# Altium PCB PCB1.pcbdoc (part 1 of 2)
Units mil, origin at the board's own origin, x right, y up, seen from the top; angles counter-clockwise.
Board outline 826.77 x 2007.87 mil, 4 copper layers (Top Layer, Inner1, Inner2, Bottom Layer), stack 62.447 mil thick; 60 components, 78 nets, 305 pads, 176 vias.
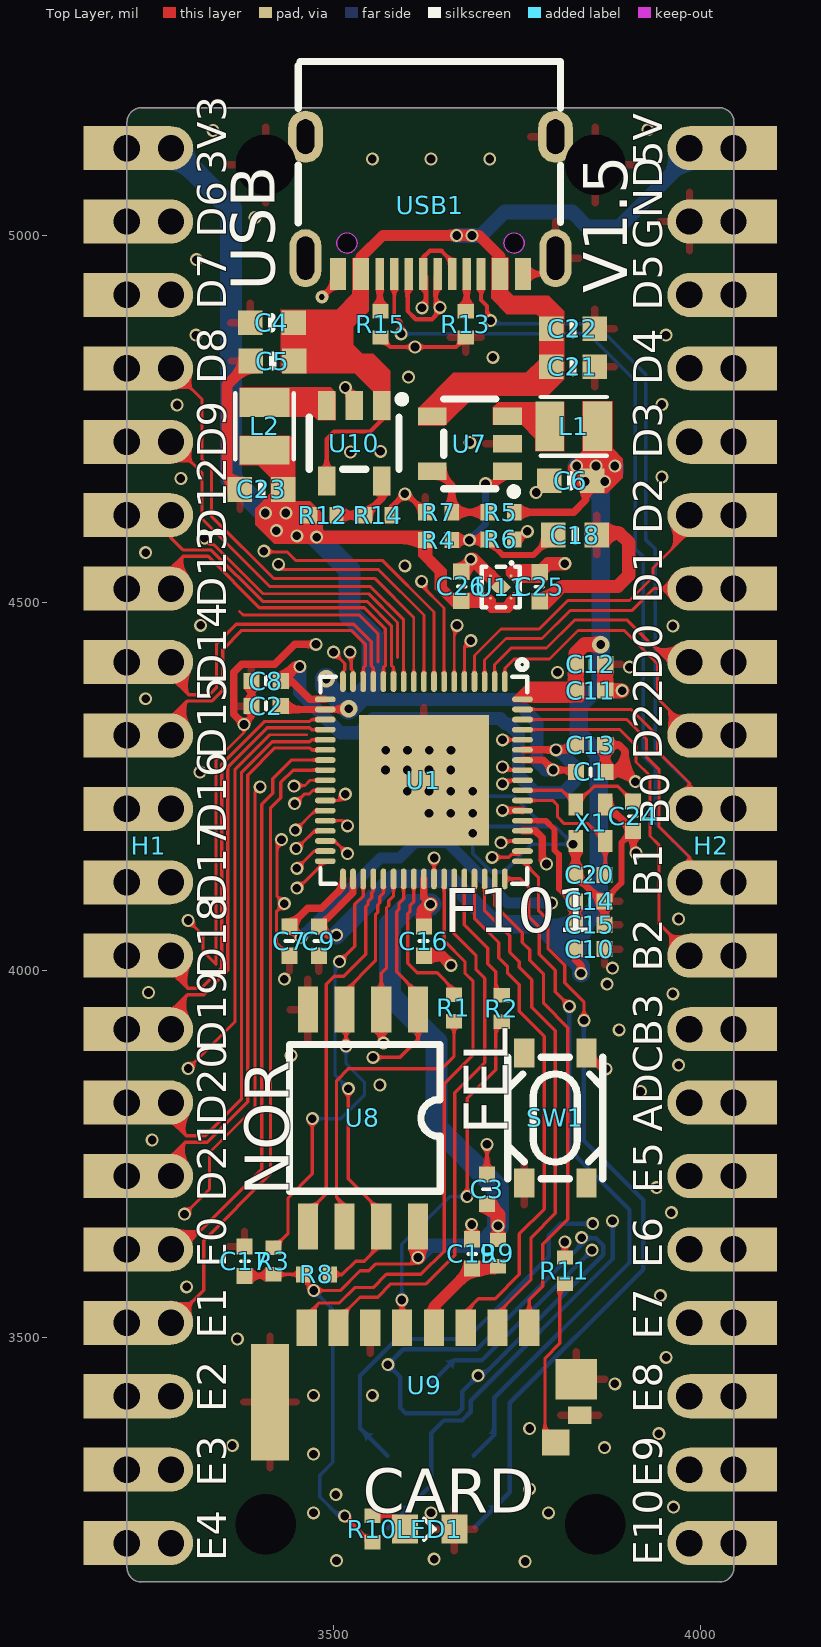
[diagram p0: Top Layer view]
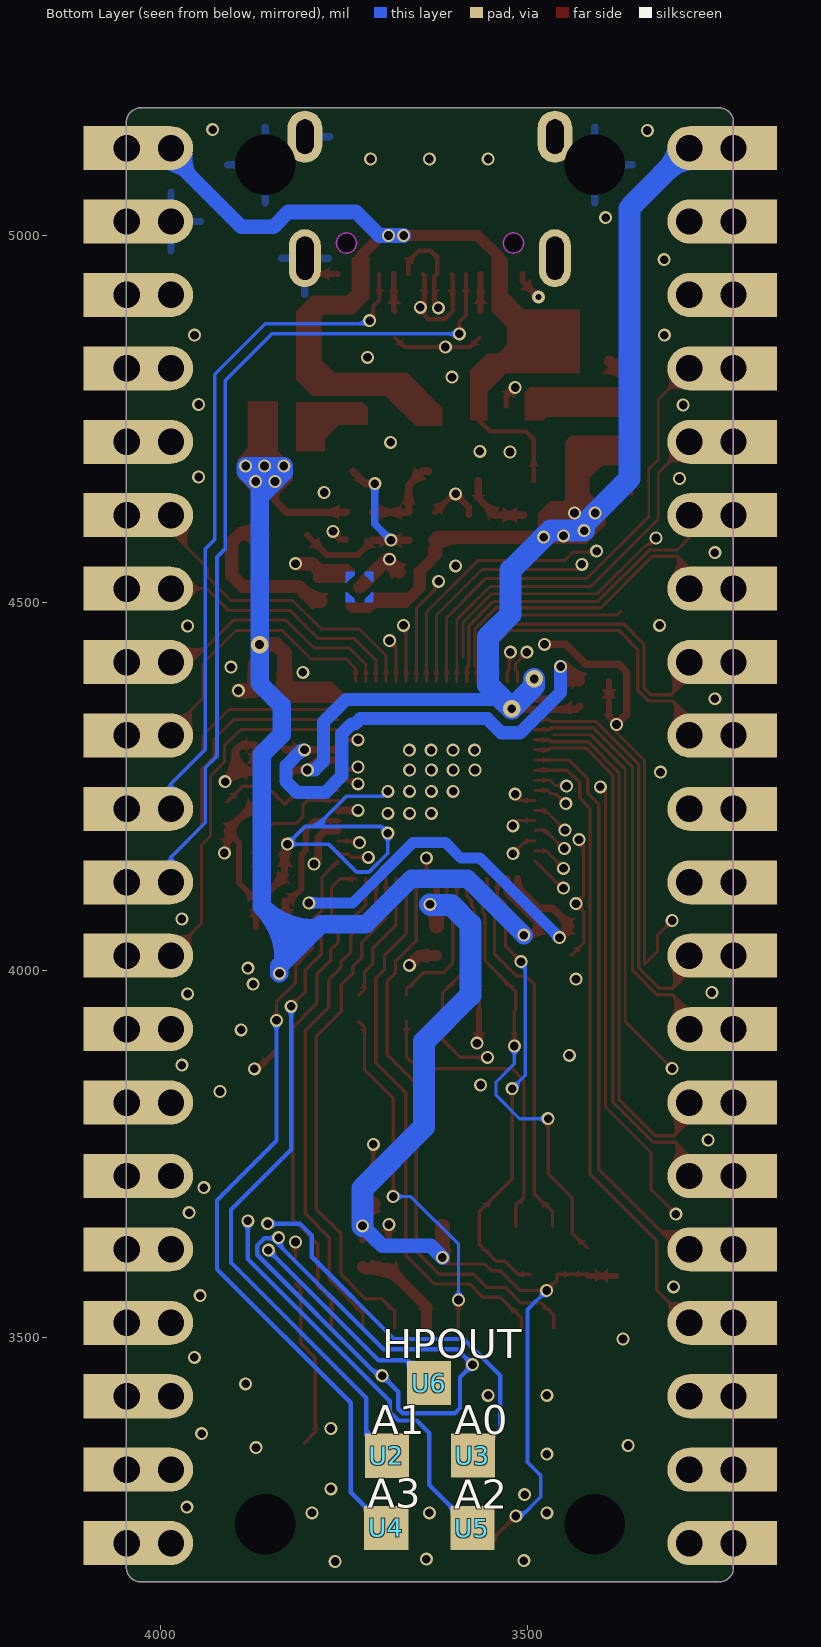
[diagram p1: Bottom Layer view, seen from below]
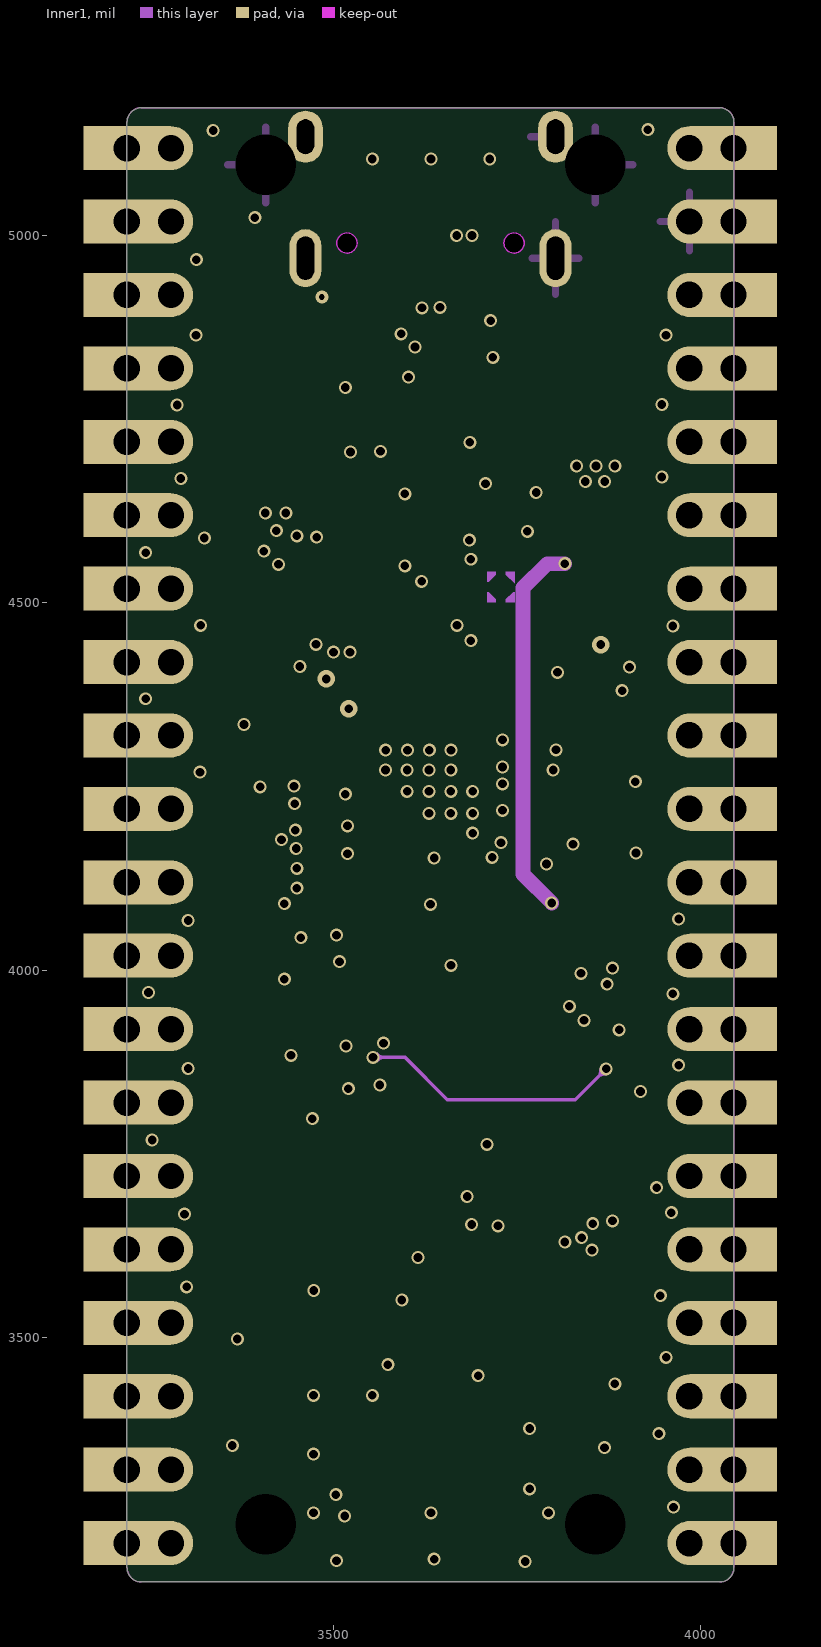
[diagram p2: Inner1]
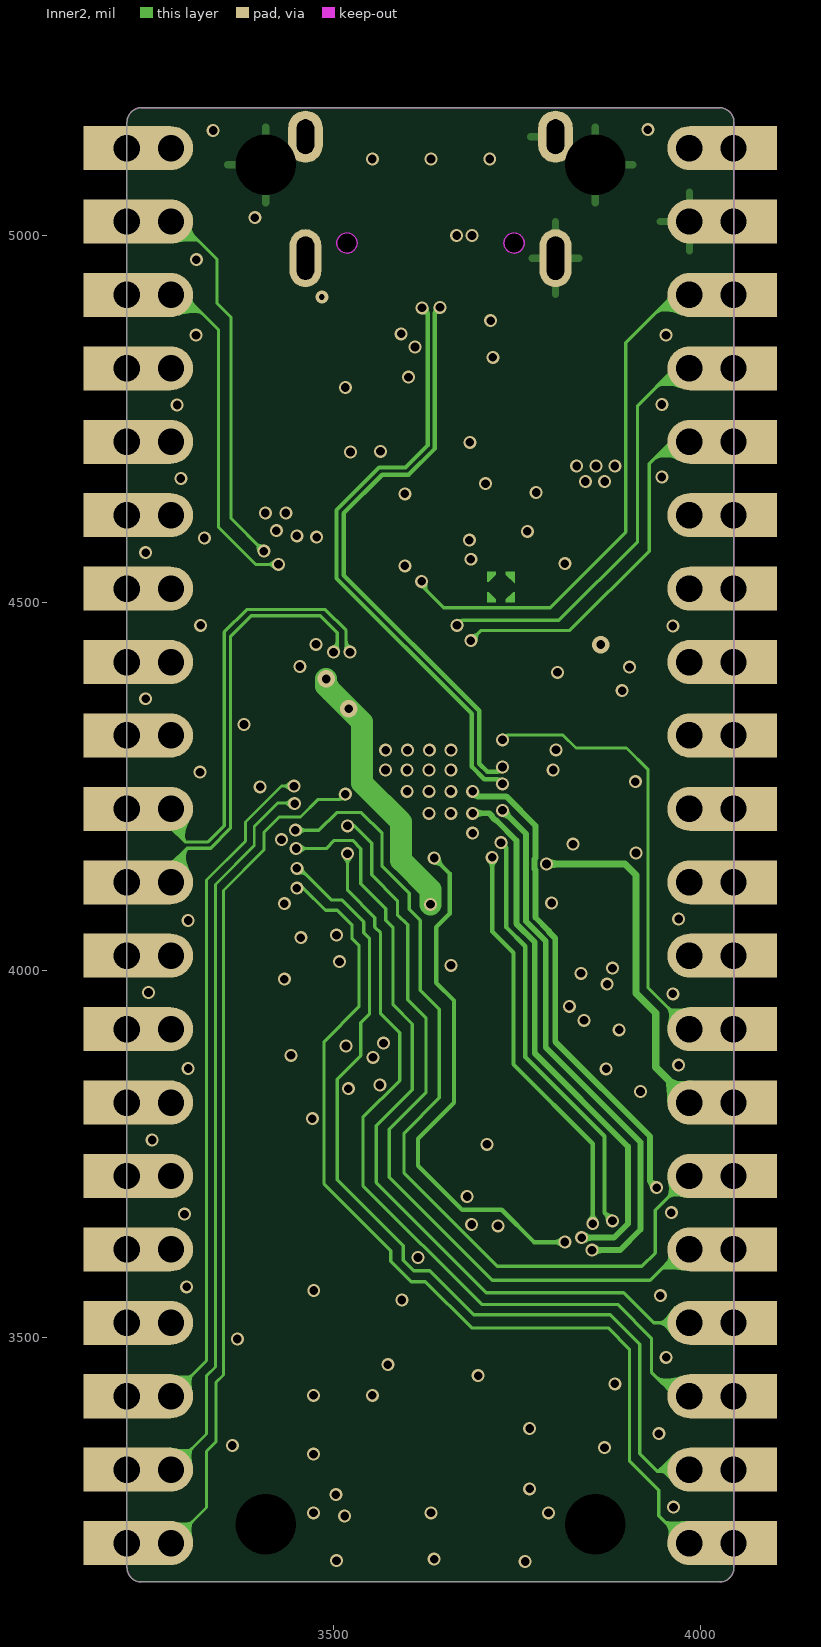
[diagram p3: Inner2]

## Layer stack, top to bottom
Top Layer: signal copper 1.378
Dielectric1: surface 8.283, 7628 RC49% 8.6mil, Dk 0
Inner1: signal copper 0.598
Dielectric2: surface 41.929, 1.1mm H/HOZ Copper, Dk 0
Inner2: signal copper 0.598
Dielectric3: surface 8.283, 7628 RC49% 8.6mil, Dk 0
Bottom Layer: signal copper 1.378

## Board outline
3238.8,5174.44 4026.2,5174.44 cw(c4026.2,5154.75) 4045.89,5154.75 4045.89,3186.25 cw(c4026.2,3186.25) 4026.2,3166.56 3238.8,3166.56 cw(c3238.8,3186.25) 3219.11,3186.25 3219.11,5154.75 cw(c3238.8,5154.75) 3238.8,5174.44

## Design rules (kind name [scope] priority, off if disabled: settings)
BoardOutlineClearance safeClearance [All] p0: genericclearance=10 ignorepadtopadclearanceinfootprint=FALSE except(0: Arc-SplitContinuation Track-SplitContinuation SMDPad-SplitContinuation THPad-SplitContinuation Via-SplitContinuation Fill-SplitContinuation Poly-SplitContinuation Region-SplitContinuation Text-SplitContinuation)
BoardOutlineClearance otherClearance [All] p0: genericclearance=10 ignorepadtopadclearanceinfootprint=FALSE except(0: Arc-SplitContinuation Track-SplitContinuation SMDPad-SplitContinuation THPad-SplitContinuation Via-SplitContinuation Fill-SplitContinuation Poly-SplitContinuation Region-SplitContinuation Text-SplitContinuation)
Clearance safeClearance [All] p1: gap=7 ignorepadtopadclearanceinfootprint=FALSE
Clearance otherClearance [All] p1: gap=7 ignorepadtopadclearanceinfootprint=FALSE
DiffPairsRouting differentialPair [All] p1: maxuncoupledlength=50 minlimit=4 maxlimit=Infinity mostfreqgap=4 toplayer_minwidth=4 toplayer_prefwidth=10 toplayer_maxwidth=100 bottomlayer_minwidth=4 bottomlayer_prefwidth=10 bottomlayer_maxwidth=100 midlayer1_minwidth=4 midlayer1_prefwidth=10 midlayer1_maxwidth=100 midlayer2_minwidth=4 midlayer2_prefwidth=10 midlayer2_maxwidth=100
PasteMaskExpansion pasteMaskExpansion [All] p1: expansion=0
PlaneConnect innerPlane [All] p1: planeconnectstyle=Relief reliefexpansion=20 reliefentries=4 reliefconductorwidth=10 reliefairgap=10
PolygonConnect copperRegion [All] p1: connectstyle=Relief reliefentries=4 reliefconductorwidth=10 polygonreliefangle="90 Angle" airgapwidth=10
PolygonConnect TBCopper [All] p1: connectstyle=Relief reliefentries=4 reliefconductorwidth=6 polygonreliefangle="90 Angle" airgapwidth=6
PolygonConnect DRAMCopper [All] p1: connectstyle=Relief reliefentries=4 reliefconductorwidth=4 polygonreliefangle="90 Angle" airgapwidth=4
RoutingVias viaSize [All] p1: viastyle="Through Hole" holewidth=7.9 minholewidth=7.9 maxholewidth=236.2 width=7.9 minwidth=7.9 maxwidth=236.2
SolderMaskExpansion solderMaskExpansion [IsVia] p1: useseparateexpansions=TRUE expansion=-1000 expansionbottom=-1000
SolderMaskExpansion solderMaskExpansion [All] p2: useseparateexpansions=TRUE expansion=4 expansionbottom=4
Width trackWidth [All] p1: maxlimit=100 minlimit=4 preferedwidth=4

## Components (designator, comment, footprint, x,y, rotation, side; value= is the part's Value field where it differs from the comment)
C1 "100nF" C0402-NSK 3850.51,4269.78 r180 top
C2 "100nF" C0402-NSK 3408.5,4359.5 r0 top
C3 "100nF" C0402-NSK 3709.5,3701.5 r90 top
C4 "22uF" C0603-NSK 3416.5,4881.5 r0 top
C5 "100nF" C0603-NSK 3417.5,4829.5 r0 top
C6 "22uF" C0603-NSK 3823.5,4666.5 r0 top
C7 "2.2uF" C0402-NSK 3440.5,4039.5 r90 top
C8 "2.2uF" C0402-NSK 3408.5,4393.5 r0 top
C9 "2.2uF" C0402-NSK 3480.5,4039.5 r90 top
C10 "2.2uF" C0402-NSK 3849.5,4028.5 r180 top
C11 "1uF" C0402-NSK 3850.5,4380.5 r180 top
C12 "1uF" C0402-NSK 3850.5,4416.5 r180 top
C13 "2.2uF" C0402-NSK 3850.5,4306.5 r180 top
C14 "10uF" C0402-NSK 3849.5,4093.5 r180 top
C15 "100nF" C0402-NSK 3849.5,4061.5 r180 top
C16 "100nF" C0402-NSK 3623.5,4039.5 r90 top
C17 "100nF" C0402-NSK 3379.22,3603.51 r270 top
C18 "100nF" C0603-NSK 3829.5,4592.5 r180 top
C19 "100nF" C0402-NSK 3688.97,3613.35 r270 top
C20 "22pF" C0402-NSK 3849.5,4129.5 r180 top
C21 "22uF" C0603-NSK 3826.5,4821.5 r180 top
C22 "100nF" C0603-NSK 3826.5,4873.5 r180 top
C23 "22uF" C0603-NSK 3402.5,4654.5 r0 top
C24 "22pF" C0402-NSK 3908.5,4209.5 r90 top
C25 "1uF" C0402-NSK 3781.28,4521.9 r90 top
C26 "100nF" C0402-NSK 3674.5,4522.5 r270 top
H1 "" 2.54PHSM-1X20P 3234.5,4169.5 r90 top
H2 "" 2.54PHSM-1X20P 4029.74,4169.5 r270 top
L1 "" IND-SMD_L2.0-W1.6_1 3827.5,4740.5 r180 top
L2 "" IND-SMD_L2.0-W1.6_1 3406.5,4740.5 r90 top
LED1 "" "LED0603 NSK" 3631.5,3238.5 r180 top
R1 "33Ω" R0402-NSK 3664.5,3948.5 r90 top
R2 "33Ω" R0402-NSK 3729.5,3947.5 r270 top
R3 "10kΩ" R0402-NSK 3418.5,3603.5 r270 top
R4 "100kΩ" R0402-NSK 3643.5,4585.5 r180 top
R5 "75kΩ" R0402-NSK 3728.5,4623.5 r0 top
R6 "100kΩ" R0402-NSK 3728.5,4586.5 r180 top
R7 "100kΩ" R0402-NSK 3643.5,4623.5 r0 top
R8 "10kΩ" R0402-NSK 3477.5,3585.5 r0 top
R9 "1Ω" R0402-NSK 3724.41,3614.33 r90 top
R10 "5.1kΩ" R0402-NSK 3553.5,3238.5 r270 top
R11 "10kΩ" R0402-NSK 3815.5,3590.5 r90 top
R12 "680kΩ" R0402-NSK 3486.5,4619.5 r180 top
R13 "5.1kΩ" R0402-NSK 3680.5,4879.5 r90 top
R14 "150kΩ" R0402-NSK 3561.5,4619.5 r180 top
R15 "5.1kΩ" R0402-NSK 3564.5,4879.5 r90 top
SW1 "TS3425BA" SW-SMD_4P-L4.2-W3.2-P2.15-LS4.6-1 3802.5,3798.5 r90 top
U1 "" QFN-68_L7.0-W7.0-P0.35-TL-EP4.5 3623.5,4258.5 r270 top
U2 "" PAD60 3691.2,3338.44 r180 top
U3 "" PAD60 3573.97,3338.59 r180 top
U4 "" PAD60 3691.97,3240.22 r0 top
U5 "" PAD60 3574.66,3239.9 r0 top
U6 "" PAD60 3633.66,3437.53 r0 top
U7 "" SOT-23-5_L3.0-W1.7-P0.95-LS2.8-BR 3686.02,4716.7 r0 top
U8 "PY25Q128HA-SUH-IT" SOP-8_L5.2-W5.3-P1.27-LS7.9-BL 3540.5,3798.5 r180 top
U9 "MUP-M617-2" TF-SMD_MUP-M617-2 3640.5,3434.5 r0 top
U10 "" SOT-23-5_L3.0-W1.7-P0.95-LS2.8-BR 3528.5,4717.5 r90 top
U11 "CJ6211B12F" UDFN-4_L1.0-W1.0-P0.65-BL-EP 3728.26,4521.69 r180 top
USB1 "TYPE-C 16PIN 2MD(073)" USB-C-SMD_TYPE-C-16PIN-2MD-073 3632.5,5041.5 r180 top
X1 "24MHz" osc-smd_4p-l2.0-w1.6-bl 3850.5,4200.5 r90 top

## Footprints (in the part's own frame and the unit in brackets; to place one, negate y for a bottom-side part, rotate by r counter-clockwise, add the part's x,y. Pads: shape width x height; smd on the part's side, far side on the other; paste and mask are expansions set on the pad)
2.54PHSM-1X20P [mil]
  round 60 hole 36 paste+0 mask+5: 1(950,-44.53) 2(850,-44.53) 3(750,-44.53) 4(650,-44.53) 5(550,-44.53) 6(450,-44.53) 7(350,-44.53) 8(250,-44.53) 9(150,-44.53) 10(50,-44.53) 11(-50,-44.53) 12(-150,-44.53) 13(-250,-44.53) 14(-350,-44.53) 15(-450,-44.53) 16(-550,-44.53) 17(-650,-44.53) 18(-750,-44.53) 19(-850,-44.53) 20(-950,-44.53)
  rect 60x118.11 hole 36 paste+0 mask+5: 1(950,15.47) 2(850,15.47) 3(750,15.47) 4(650,15.47) 5(550,15.47) 6(450,15.47) 7(350,15.47) 8(250,15.47) 9(150,15.47) 10(50,15.47) 11(-50,15.47) 12(-150,15.47) 13(-250,15.47) 14(-350,15.47) 15(-450,15.47) 16(-550,15.47) 17(-650,15.47) 18(-750,15.47) 19(-850,15.47) 20(-950,15.47)
C0402-NSK [mil]
  rect 22x22 smd paste+0 mask+2: 1(-19.99,0) 2(20.01,0)
  silkscreen extent 0,-5 0,6
C0603-NSK [mm]
  rect 0.85x0.85 smd paste+0 mask+0.051: 1(-0.75,0) 2(0.75,0)
  silkscreen extent 0,-0.21 0,0.21
IND-SMD_L2.0-W1.6_1 [mm]
  rect 1x1.72 smd paste+0 mask+0.051: 1(0.828,0) 2(-0.828,0)
  silkscreen extent -1.14,-1.02 1.14,1.02
"LED0603 NSK" [mm]
  rect 0.9x1 smd paste+0 mask+0.051: 1(-0.85,0) 2(0.85,0)
  silkscreen extent -0.17,-0.36 0.2,0.37
osc-smd_4p-l2.0-w1.6-bl [mil]
  rect 30x20 smd: 1(-25,-20) 2(25,-20) 3(25,20) 4(-25,20)
PAD60 [mil]
  rect 60x60 smd far side: 1(0,0)
QFN-68_L7.0-W7.0-P0.35-TL-EP4.5 [mm]
  oval 0.723x0.196 smd paste-100 mask+0.051: 1(-3.411,2.8) 2(-3.411,2.45) 3(-3.411,2.1) 4(-3.411,1.75) 5(-3.411,1.4) 6(-3.411,1.05) 7(-3.411,0.7) 8(-3.411,0.35) 9(-3.411,0) 10(-3.411,-0.35) 11(-3.411,-0.7) 12(-3.411,-1.05) 13(-3.411,-1.4) 14(-3.411,-1.75) 15(-3.411,-2.1) 16(-3.411,-2.45) 17(-3.411,-2.8) 35(3.411,-2.8) 36(3.411,-2.45) 37(3.411,-2.1) 38(3.411,-1.75) 39(3.411,-1.4) 40(3.411,-1.05) 41(3.411,-0.7) 42(3.411,-0.35) 43(3.411,0) 44(3.411,0.35) 45(3.411,0.7) 46(3.411,1.05) 47(3.411,1.4) 48(3.411,1.75) 49(3.411,2.1) 50(3.411,2.45) 51(3.411,2.8)
  oval 0.196x0.723 smd paste-100 mask+0.051: 18(-2.8,-3.411) 19(-2.45,-3.411) 20(-2.1,-3.411) 21(-1.75,-3.411) 22(-1.4,-3.411) 23(-1.05,-3.411) 24(-0.7,-3.411) 25(-0.35,-3.411) 26(0,-3.411) 27(0.35,-3.411) 28(0.7,-3.411) 29(1.05,-3.411) 30(1.4,-3.411) 31(1.75,-3.411) 32(2.1,-3.411) 33(2.45,-3.411) 34(2.8,-3.411) 52(2.8,3.411) 53(2.45,3.411) 54(2.1,3.411) 55(1.75,3.411) 56(1.4,3.411) 57(1.05,3.411) 58(0.7,3.411) 59(0.35,3.411) 60(0,3.411) 61(-0.35,3.411) 62(-0.7,3.411) 63(-1.05,3.411) 64(-1.4,3.411) 65(-1.75,3.411) 66(-2.1,3.411) 67(-2.45,3.411) 68(-2.8,3.411)
  rect 4.5x4.5 smd paste-100 mask+0.051: 69(0,0)
  silkscreen extent -4.16,-3.58 3.58,3.58
R0402-NSK [mil]
  rect 19.68x22 smd paste+0 mask+2: 1(-18,0) 2(18,0)
SOP-8_L5.2-W5.3-P1.27-LS7.9-BL [mm]
  rect 0.7x1.6 smd: 1(-1.905,-3.75) 2(-0.635,-3.75) 3(0.635,-3.75) 4(1.905,-3.75) 5(1.905,3.75) 6(0.635,3.75) 7(-0.635,3.75) 8(-1.905,3.75)
  silkscreen extent -2.67,-2.54 2.54,2.54
SOT-23-5_L3.0-W1.7-P0.95-LS2.8-BR [mm]
  rect 1x0.6 smd paste+0 mask+0.051: 1(1.3,-0.95) 2(1.3,0) 3(1.3,0.95) 4(-1.3,0.95) 5(-1.3,-0.95)
  silkscreen extent -0.9,-1.78 1.65,1.55
SW-SMD_4P-L4.2-W3.2-P2.15-LS4.6-1 [mm]
  rect 1x0.7 smd: 1(-2.25,1.075) 2(2.25,1.075) 3(-2.25,-1.075) 4(2.25,-1.075)
  silkscreen extent -2.1,-1.65 2.1,1.65
TF-SMD_MUP-M617-2 [mm]
  rect 0.7x1.25 smd paste-100 mask+0.05: 1(3.215,1.987) 2(2.115,1.987) 3(1.015,1.987) 4(-0.085,1.987) 5(-1.185,1.987) 6(-2.285,1.987) 7(-3.385,1.987) 8(-4.485,1.987)
  rect 0.81x0.6 smd paste-100 mask+0.05: 9(4.96,-1.037)
  rect 0.95x0.9 smd paste-100 mask+0.05: 10(4.13,-1.987)
  rect 1.45x1.4 smd paste-100 mask+0.05: 11(4.84,0.212)
  rect 1.3x4.03 smd paste-100 mask+0.05: 12(-5.755,-0.583)
UDFN-4_L1.0-W1.0-P0.65-BL-EP [mm]
  round 0.099 smd: 1(-0.355,-0.385)
  round 0.101 smd: 2(0.353,-0.389)
  round 0.1 smd: 3(0.353,0.389) 4(-0.353,0.389)
  rect 0.5x0.5 smd rot 45: 5(0,0)
  Top Layer region: -0.175,-0.525 -0.475,-0.525 -0.475,-0.125 -0.175,-0.425
  Top Layer region: 0.175,0.525 0.475,0.525 0.475,0.175 0.425,0.175 0.175,0.425
  Top Layer region: -0.475,0.175 -0.475,0.525 -0.175,0.525 -0.175,0.475 -0.175,0.425 -0.425,0.175
  Top Layer region: 0.475,-0.175 0.475,-0.525 0.175,-0.525 0.175,-0.425 0.425,-0.175
  Bottom Layer region: -0.175,-0.525 -0.475,-0.525 -0.475,-0.125 -0.175,-0.425
  Bottom Layer region: 0.175,0.525 0.475,0.525 0.475,0.175 0.425,0.175 0.175,0.425
  Bottom Layer region: -0.475,0.175 -0.475,0.525 -0.175,0.525 -0.175,0.475 -0.175,0.425 -0.425,0.175
  Bottom Layer region: 0.475,-0.175 0.475,-0.525 0.175,-0.525 0.175,-0.425 0.425,-0.175
  Multi-Layer region: -0.175,-0.525 -0.475,-0.525 -0.475,-0.125 -0.175,-0.425
  Multi-Layer region: 0.175,0.525 0.475,0.525 0.475,0.175 0.425,0.175 0.175,0.425
  Multi-Layer region: -0.475,0.175 -0.475,0.525 -0.175,0.525 -0.175,0.475 -0.175,0.425 -0.425,0.175
  Multi-Layer region: 0.475,-0.175 0.475,-0.525 0.175,-0.525 0.175,-0.425 0.425,-0.175
  silkscreen extent -0.66,-0.88 0.66,0.7
USB-C-SMD_TYPE-C-16PIN-2MD-073 [mm]
  oval 1.2x1.8 hole 0.6 slot 1.2 at 90 deg paste+0 mask+0.05: 13(-4.325,-2.375) 14(4.325,-2.375)
  oval 1.1x2 hole 0.6 slot 1.5 at 90 deg paste+0 mask+0.05: 13(-4.325,1.825) 14(4.325,1.825)
  rect 0.55x1.1 smd paste-100 mask+0.05: A1B12(-3.2,2.375) A4B9(-2.4,2.375) B1A12(3.2,2.375) B4A9(2.4,2.375)
  rect 0.3x1.1 smd paste-100 mask+0.05: A5(-1.25,2.375) A6(-0.25,2.375) A7(0.25,2.375) A8(1.25,2.375) B5(1.75,2.375) B6(0.75,2.375) B7(-0.75,2.375) B8(-1.75,2.375)
  Board Outline Layer circle w0.003: c-2.89,1.305 r0.35
  Board Outline Layer circle w0.003: c2.89,1.305 r0.35
  Board Outline Layer region: -3.24,1.305 -3.205,1.457 -3.108,1.579 -2.968,1.646 -2.812,1.646 -2.672,1.579 -2.575,1.457 -2.54,1.305 -2.54,1.305 -2.575,1.153 -2.672,1.031 -2.812,0.964 -2.968,0.964 -3.108,1.031 -3.205,1.153 -3.24,1.305
  Board Outline Layer region: -3.24,1.305 -3.231,1.383 -3.205,1.457 -3.164,1.523 -3.108,1.579 -3.042,1.62 -2.968,1.646 -2.89,1.655 -2.812,1.646 -2.738,1.62 -2.672,1.579 -2.616,1.523 -2.575,1.457 -2.549,1.383 -2.54,1.305 -2.549,1.227 -2.575,1.153 -2.616,1.087 -2.672,1.031 -2.738,0.99 -2.812,0.964 -2.89,0.955 -2.968,0.964 -3.042,0.99 -3.108,1.031 -3.164,1.087 -3.205,1.153 -3.231,1.227
  Board Outline Layer region: 2.54,1.305 2.575,1.457 2.672,1.579 2.812,1.646 2.968,1.646 3.108,1.579 3.205,1.457 3.24,1.305 3.24,1.305 3.205,1.153 3.108,1.031 2.968,0.964 2.812,0.964 2.672,1.031 2.575,1.153 2.54,1.305
  Board Outline Layer region: 2.54,1.305 2.549,1.383 2.575,1.457 2.616,1.523 2.672,1.579 2.738,1.62 2.812,1.646 2.89,1.655 2.968,1.646 3.042,1.62 3.108,1.579 3.164,1.523 3.205,1.457 3.231,1.383 3.24,1.305 3.231,1.227 3.205,1.153 3.164,1.087 3.108,1.031 3.042,0.99 2.968,0.964 2.89,0.955 2.812,0.964 2.738,0.99 2.672,1.031 2.616,1.087 2.575,1.153 2.549,1.227
  Multi-Layer board cut-out: -3.24,1.305 -3.205,1.457 -3.108,1.579 -2.968,1.646 -2.812,1.646 -2.672,1.579 -2.575,1.457 -2.54,1.305 -2.54,1.305 -2.575,1.153 -2.672,1.031 -2.812,0.964 -2.968,0.964 -3.108,1.031 -3.205,1.153 -3.24,1.305
  Multi-Layer board cut-out: 2.54,1.305 2.575,1.457 2.672,1.579 2.812,1.646 2.968,1.646 3.108,1.579 3.205,1.457 3.24,1.305 3.24,1.305 3.205,1.153 3.108,1.031 2.968,0.964 2.812,0.964 2.672,1.031 2.575,1.153 2.54,1.305
  silkscreen extent -4.5,-4.97 4.57,0.6

## Free pads (board coordinates)
  round 19.68 hole 82.68: ""(3407.93,3245.26) ""(3407.93,5096.65) ""(3856.75,3245.26) ""(3856.75,5096.65)

## Via types
v1: diameter 17.7, hole 11.8, Top Layer to Bottom Layer, 172 vias
v2: diameter 24, hole 12, Top Layer to Bottom Layer, 3 vias
v3: diameter 17.7, hole 7.9, Top Layer to Bottom Layer, 1 vias

## Nets (pads, with @x,y where several pads share a name; then routed paths per layer and width w, separated by ;. In a path a pad name is that pad's centre, name@x,y a point inside that pad or via, vN(x,y) a via of type N, cw(c..) or ccw(c..) an arc to the next point about the centre after c; other vN are vias at no path point)
$1N145: C19.2 R9.1 U9.4 | length 138.7
  Top Layer w15: U9.4@3637.15,3512.74 3637.15,3541.52 C19.2@3688.97,3593.35 3721.41,3593.35 R9.1@3724.4,3596.34
$1N154: R11.1 U9.10 | length 233.5
  Top Layer w4.5: U9.10@3803.09,3356.26 3788.5,3370.84 3788.5,3471.5 3808.5,3491.5 3808.5,3565.51 R11.1@3815.5,3572.5
$1N164: R1.2 U1.42 | length 203
  Top Layer w4.5: U1.42@3609.72,4124.19 3609.72,4092.72 3604.5,4087.5 3604.5,4079.5 3601.5,4076.5 3601.5,4009.5 3614.5,3996.5 3641.5,3996.5 3664.5,3973.5 R1.2@3664.5,3966.5
$1N165: R2.1 U1.47 | length 179.8
  Top Layer w4.5: U1.47@3678.62,4124.19 3678.62,4061.38 3710.5,4029.5 3710.5,4008.5 3721.5,3997.5 3721.5,3973.5 R2.1@3729.5,3965.5
$1N235: R13.2 USB1.A5 | length 51
  Top Layer w8: R13.2@3680.5,4897.5 3681.7,4898.71 USB1.A5@3681.7,4947.99
$1N236: R15.2 USB1.B5 | length 50.9
  Top Layer w8: USB1.B5@3563.59,4947.99 3563.59,4898.4 R15.2@3564.5,4897.5
$1N238: C18.2 R4.1 R6.2 U7.1 | length 282.1
  Top Layer w8: R6.2@3710.5,4586.5 3710.5,4585.5 3730.5,4565.5 3772.97,4565.5 C18.2@3799.97,4592.5
  Top Layer w10: R4.1@3661.5,4585.5 v1(3685.5,4585.5) 3709.5,4585.5 R6.2@3710.5,4586.5 ; v1(3707.5,4662.5) 3720.41,4662.5 U7.1@3737.2,4679.3
  Bottom Layer w10: v1(3685.5,4585.5) 3707.5,4607.5 v1(3707.5,4662.5)
$1N245: R12.1 R14.2 U10.5 | length 95.5
  Top Layer w10: R12.1@3504.5,4619.5 R14.2@3543.5,4619.5 3566.9,4642.9 U10.5@3566.9,4666.31
$1N246: R5.1 R7.2 U7.5 | length 120.4
  Top Layer w10: U7.5@3634.83,4679.3 3642.7,4679.3 3661.5,4660.5 R7.2@3661.5,4623.5 R5.1@3710.5,4623.5
$1N249: L1.1 U7.3
$1N250: L2.1 U10.3
$1N261: LED1.2 R10.1 | length 52
  Top Layer w5: R10.1@3553.5,3256.5 3580,3256.5 LED1.2@3598.04,3238.5
AVCC: C14.2 C15.2 U1.56 | length 193.1
  Top Layer w8: U1.56@3757.81,4203.38 3789.62,4203.38 3801.5,4191.5 3801.5,4163.18 3807.5,4157.18 3807.5,4110.5 3824.5,4093.5 C14.2@3829.49,4093.5
  Top Layer w10: C15.2@3829.49,4061.5 C14.2@3829.49,4093.5
DXIN: C20.1 U1.58 X1.1 | length 191.4
  Top Layer w4.5: U1.58@3757.81,4230.94 3799.06,4230.94 3805.5,4224.5 3805.5,4208.5 3814.5,4199.5 3846.5,4199.5 X1.1@3870.5,4175.5 3870.5,4130.51 C20.1@3869.49,4129.5
DXOUT: C24.2 U1.59 X1.3 | length 177.7
  Top Layer w4.5: U1.59@3757.81,4244.72 3811.28,4244.72 X1.3@3830.5,4225.5 3855.5,4250.5 3887.51,4250.5 C24.2@3908.5,4229.51
GND: C1.1 C2.1 C3.2 C4.1 C5.1 C6.1 C7.1 C8.1 C9.1 C10.1 C11.1 C12.1 C13.1 C14.1 C15.1 C16.1 C17.1 C18.1 C19.1 C20.2 C21.1 C22.1 C23.1 C24.1 C25.1 C26.1 H2.19 LED1.1 pad.@3407.93,5096.65 pad.@3856.75,5096.65 R6.1 R7.1 R13.1 R14.1 R15.1 SW1.1 U1.69 U7.2 U8.4 U9.6 U9.9 U9.11 U9.12 U10.2 U11.2 U11.5 USB1.13 USB1.A1B12 USB1.B1A12 X1.2 X1.4 | length 6807.5
  Top Layer w4: v1(3297.5,3667.5) 3331.5,3701.5 3331.5,3751.5 3393.5,3813.5 3393.5,4242.5 v1(3400.5,4249.5) ; v1(3302.5,3865.95) 3366.5,3929.95 3366.5,4273.5 3413.5,4320.5 3463.5,4320.5 ; v1(3302.5,4067.5) 3322.5,4047.5 3322.5,4025.5 3340.25,4007.75 3340.25,4285.25 3378.5,4323.5 v1(3378.5,4334.5) ; v1(3324.5,4588.5) 3333.25,4579.75 3334,4579.75 cw(c3334,4572) 3339.48,4577.48 3404.46,4512.5 3548.5,4512.5 3587.5,4473.5 3587.5,4425.5 ; 3372.5,4488.5 3377.5,4483.5 3535.5,4483.5 3560.8,4458.2 3560.8,4419.41 ; v1(3429.5,4177.5) 3423.5,4171.5 3423.5,4100.5 v1(3433.5,4090.5) 3422.5,4079.5 3422.5,4037.51 C7.1@3440.5,4019.51
  Top Layer w5: R15.1@3564.5,4861.5 3577.5,4848.5 v1(3611.5,4848.5) 3667.49,4848.5 R13.1@3680.5,4861.5
  Top Layer w6: C3.2@3709.5,3721.51 v1(3709.5,3762.5)
  Top Layer w8: v1(3378.5,4334.5) 3388.51,4344.51 C2.1@3388.51,4359.5 C8.1@3388.51,4393.5 ; v3(3484.5,4916.5) 3506.51,4938.52 USB1.B1A12@3506.51,4947.99 ; v1(3516.5,4793.5) 3528.5,4781.5 U10.2@3528.5,4768.69 ; R14.1@3579.5,4619.5 3579.5,4630.5 v1(3597.5,4648.5) 3600.51,4648.5 R7.1@3625.5,4623.5 ; R6.1@3746.5,4586.5 3753.5,4586.5 v1(3764.5,4597.5) ; USB1.A1B12@3758.49,4947.99 3781.12,4947.99 USB1.13@3802.77,4969.65 ; C15.1@3869.49,4058.5 3869.49,4095.5 3892.5,4118.51 3892.5,4173.51 C24.1@3908.5,4189.51 3908.5,4163.5 v1(3912.5,4159.5)
  Top Layer w10: v1(3378.5,4334.5) 3364.5,4348.5 3364.5,4405.5 3375.5,4416.5 3420.5,4416.5 3447.5,4443.5 v1(3476.5,4443.5) ; v1(3688.5,3653.5) 3688.97,3653.03 C19.1@3688.97,3633.35 ; X1.4@3830.5,4175.5 3830.5,4130.51 C20.2@3829.49,4129.5 3863.49,4095.5 C14.1@3869.49,4095.5 ; X1.2@3870.5,4225.5 3872.51,4225.5 C24.1@3908.5,4189.51 ; C13.1@3870.51,4301.78 C1.1@3870.51,4269.78 3898.22,4269.78 ; C13.1@3870.49,4306.5 3889.5,4306.5 3897.5,4298.5 3897.5,4270.5 3898.22,4269.78 ; v1(3911.5,4256.5) 3898.22,4269.78
  Top Layer w15: C23.1@3372.97,4654.5 3355.5,4671.97 3355.5,4797.03 C5.1@3387.97,4829.5 ; C16.1@3623.5,4019.51 3647.49,4019.51 v1(3660.5,4006.5)
  Top Layer w18: C26.1@3674.5,4542.49 3687.5,4555.49 v1(3687.5,4559.5) 3690.45,4559.5 3715.46,4534.49 U11.5@3728.26,4521.69 ; C25.1@3781.28,4501.91 3790.91,4501.91 3811.5,4522.5 3887.5,4522.5 3902.5,4537.5 3902.5,4582.5 3889.77,4595.23 3861.75,4595.23 C18.1@3859.03,4592.5
  Top Layer w20: C12.1@3870.49,4416.5 C11.1@3870.49,4380.5 v1(3893.5,4380.5)
  Inner2 w8: v1(3689.86,4213.5) 3712.5,4213.5 3715.94,4210.06 ccw(c3730.5,4217.5) 3723.06,4202.94 3749.5,4176.5 3749.5,4063.24 3774.5,4038.24 3774.5,3886.5 3901.5,3759.5 3901.5,3654.5 3882.5,3635.5 v1(3838.5,3635.5) ; v1(3689.86,4243.5) 3696.86,4236.5 3735.5,4236.5 3775.5,4196.5 3775.5,4152.62 3774.15,4151.27 3774.15,4137.73 3775.5,4136.38 3775.5,4071.5 3793.77,4053.23 3793.77,4052.1 3802.5,4043.38 3802.5,3902.5 3931.5,3773.5 3931.5,3712.5 v1(3940.5,3703.5)
  Bottom Layer w5: v1(3689.86,4243.5) 3696.86,4236.5 3746.5,4236.5 3787.5,4195.5 ; 3787.5,4195.5 3698.86,4195.5 v1(3689.86,4186.5) 3689.86,4159.14 3715.5,4133.5 3732.5,4133.5 3770.5,4171.5 v1(3826.5,4171.5) 3802.5,4195.5 3787.5,4195.5
  Bottom Layer w6: v1(3574.5,3462.5) 3595.5,3483.5 3695.79,3483.5 3846.79,3634.5 3858.21,3634.5 3867.85,3624.86 3867.85,3612.14 3703.21,3447.5 v1(3697.5,3447.5) 3675.5,3425.5 3675.5,3402.5 3669.5,3396.5 3598.5,3396.5 3591.5,3403.5 3591.5,3445.5 v1(3574.5,3462.5)
  other v1: 3761.5,3194.5 3504.5,3195.5 3637.5,3197.5 3473.21,3260.66 3633.21,3260.66 3793.21,3260.66 3963.5,3268.5 3503.5,3285.5 3767.5,3293.5 3473.21,3340.66 3869.5,3349.5 3362.5,3352.5 3943.5,3368.5 3767.5,3375.64 3473.21,3420.66 3553.21,3420.66 3883.5,3436.5 3953.5,3472.5 3369.5,3497.5 3945.5,3556.5 3300.5,3568.5 3960.5,3669.5 3253.5,3768.5 3918.5,3834.5 3563.5,3843.5 3970.5,3870.5 3442.53,3883.77 3889.5,3918.5 3962.5,3967.5 3248.5,3969.5 3873.21,3980.66 3433.5,3987.5 3880.5,4002.5 3970.5,4069.5 3630.5,4213.5 3660.18,4213.5 3600.82,4243.5 3630.5,4243.5 3660.18,4243.5 3318.5,4269.5 3571.14,4272.5 3600.82,4272.5 3630.5,4272.5 3660.18,4272.5 3571.5,4299.5 3601.18,4299.5 3630.86,4299.5 3660.54,4299.5 3244.5,4369.5 3805.5,4405.5 3903.5,4412.5 3962.5,4468.5 3319.5,4469.5 3597.5,4550.5 3244.5,4568.5 3776.5,4650.5 3292.5,4669.5 3947.5,4671.5 3523.5,4705.5 3564.5,4706.5 3686.02,4718.84 3287.5,4769.5 3947.5,4770.31 3602.5,4807.5 3717.5,4834.5 3313.21,4864.7 3953.21,4864.7 3313.5,4967.5 3393.21,5024.7 3553.21,5104.7 3633.21,5104.7 3713.21,5104.7 3336.5,5143.5 3928.5,5144.5
GPADC: H2.7 U1.55 | length 537.3
  Top Layer w10: U1.55@3757.81,4189.6 3775.4,4189.6 3784.5,4180.5 3784.5,4150.5 v1(3790.5,4144.5)
  Inner2 w10: v1(3790.5,4144.5) 3897.5,4144.5 3912.5,4129.5 3912.5,3968.5 3939.5,3941.5 3939.5,3867.72 3985.21,3822 H2.7@3985.21,3819.5
HPOUT: U1.57 U6.1 | length 1047.7
  Top Layer w10: v1(3730.5,4217.5) 3757.47,4217.5 U1.57@3757.81,4217.16
  Inner2 w8: v1(3730.5,4217.5) 3762.5,4185.5 3762.5,4066.5 3789.5,4039.5 3789.5,3894.5 3918.5,3765.5 3918.5,3646.5 3890.5,3618.5 v1(3852.5,3618.5)
  Bottom Layer w6: U6.1@3633.66,3437.53 3664.63,3468.5 3702.5,3468.5 v1(3852.5,3618.5)
PA0: U1.53 U3.1 | length 1144.8
  Top Layer w4.5: v1(3716.5,4153.5) 3739.09,4153.5 3743.46,4157.87 3753.64,4157.87 U1.53@3757.81,4162.04
  Inner2 w6: v1(3716.5,4153.5) 3716.5,4052.5 3745.5,4023.5 3745.5,3871.5 3853.5,3763.5 v1(3853.5,3654.5)
  Bottom Layer w6: U3.1@3573.97,3338.59 3536.5,3376.06 3536.5,3447.5 3586.5,3497.5 3681.5,3497.5 3793.5,3609.5 3793.5,3638.5 3809.5,3654.5 v1(3853.5,3654.5)
PA1: U1.51 U2.1 | length 956.4
  Top Layer w4.5: U1.51@3733.74,4124.19 3754.81,4124.19 3766.5,4112.5 3766.5,4072.5 3780.5,4058.5 3780.5,4021.5 3802.5,3999.5 3802.5,3970.5 3821.32,3951.68 3821.32,3950.68 v1(3821.5,3950.5)
  Bottom Layer w6: U2.1@3691.2,3338.44 3719.5,3366.74 3719.5,3417.5 3903.5,3601.5 3903.5,3673.5 3821.5,3755.5 v1(3821.5,3950.5)
PA2: U1.54 U5.1 | length 1168.2
  Top Layer w4.5: v1(3728.5,4173.5) 3730.82,4175.82 U1.54@3757.81,4175.82
  Inner2 w6: v1(3728.5,4173.5) 3735.5,4166.5 3735.5,4058.5 3761.5,4032.5 3761.5,3881.5 3869.5,3773.5 3869.5,3669.5 v1(3880.5,3658.5)
  Bottom Layer w6: U5.1@3574.66,3239.9 3633.5,3298.74 3633.5,3369.5 3650.5,3386.5 3675.5,3386.5 3687.5,3398.5 3687.5,3413.5 3880.5,3606.5 v1(3880.5,3658.5)
PA3: U1.52 U4.1 | length 1071.7
  Top Layer w4.5: U1.52@3757.81,4148.26 3779.5,4126.57 3779.5,4081.5 3792.5,4068.5 3792.5,4029.5 3815.5,4006.5 3815.5,3982.5 3841.5,3956.5 v1(3841.5,3931.5)
  Bottom Layer w6: U4.1@3691.97,3240.22 3740.5,3288.74 3740.5,3410.5 3922.5,3592.5 3922.5,3686.5 3841.5,3767.5 v1(3841.5,3931.5)
PB0: H2.11 U1.67 USB1.B8 | length 1243.4
  Top Layer w4: U1.67@3757.81,4354.96 3906.04,4354.96 3941.5,4319.5 3941.5,4298.35 3985.21,4254.63 H2.11@3985.21,4219.5
  Top Layer w5: USB1.B8@3701.39,4947.99 3701.39,4912.6 3709.5,4904.5 3709.5,4889.5 v1(3714.5,4884.5)
  Bottom Layer w5: v1(3714.5,4884.5) 3718.87,4880.13 3856.87,4880.13 3925.5,4811.5 3925.5,4586.5 3938.5,4573.5 3938.5,4300.5 3985.21,4253.79 H2.11@3985.21,4219.5
PB1: H2.10 U1.66 USB1.A8 | length 1543.4
  Top Layer w4: U1.66@3757.81,4341.18 3899.82,4341.18 3926.5,4314.5 3926.5,4290.5 3943.5,4273.5 3943.5,4195.5 3985.21,4153.79 H2.10@3985.21,4119.5
  Top Layer w5: USB1.A8@3583.28,4947.99 3583.28,4891.72 3592.5,4882.5 v1(3592.5,4866.5)
  Bottom Layer w5: v1(3592.5,4866.5) 3847.5,4866.5 3911.5,4802.5 3911.5,4573.5 3922.5,4562.5 3922.5,4291.5 3938.5,4275.5 3938.5,4200.5 3985.21,4153.79 H2.10@3985.21,4119.5
PB2: H2.9 U1.65 | length 479.9
  Top Layer w4: U1.65@3757.81,4327.4 3890.6,4327.4 3912.5,4305.5 3912.5,4283.5 3931.5,4264.5 3931.5,4182.5 3943.5,4170.5 3943.5,4063.72 3985.21,4022.01 H2.9@3985.21,4019.5
PB3: H2.8 U1.64 | length 624.9
  Top Layer w4: v1(3730.5,4313.62) U1.64@3757.81,4313.62
  Inner2 w4: v1(3730.5,4313.62) 3737.17,4320.29 3812.71,4320.29 3830.5,4302.5 3899.5,4302.5 3928.5,4273.5 3928.5,3976.21 H2.8@3985.21,3919.5
PD0: H2.13 U1.2 | length 337.1
  Top Layer w4: U1.2@3719.96,4392.81 3719.96,4415.96 3742.5,4438.5 3790.5,4438.5 3828.5,4476.5 3900.5,4476.5 3957.5,4419.5 H2.13@3985.21,4419.5
PD1: H2.14 U1.3 | length 348.7
  Top Layer w4: U1.3@3706.18,4392.81 3706.18,4422.18 3735.5,4451.5 3784.5,4451.5 3822.5,4489.5 3906.5,4489.5 3936.5,4519.5 H2.14@3985.21,4519.5
PD2: H2.15 U1.4 | length 427.6
  Top Layer w4: U1.4@3692.4,4392.81 3692.4,4428.4 3728.5,4464.5 3780.5,4464.5 3819.5,4503.5 3903.5,4503.5 3935.5,4535.5 3935.5,4547.5 3985.21,4597.21 H2.15@3985.21,4619.5
PD3: H2.16 U1.5 | length 539
  Top Layer w4: U1.5@3678.62,4392.81 3678.62,4439.62 v1(3687.5,4448.5)
  Inner2 w4.5: v1(3687.5,4448.5) 3701.5,4462.5 3822.5,4462.5 3930.5,4570.5 3930.5,4689.5 3960.5,4719.5 H2.16@3985.21,4719.5
PD4: H2.17 U1.6 | length 648.3
  Top Layer w4: U1.6@3664.84,4392.81 3664.84,4465.84 v1(3668.5,4469.5)
  Inner2 w4.5: v1(3668.5,4469.5) 3675.5,4476.5 3807.5,4476.5 3914.5,4583.5 3914.5,4768.5 3965.5,4819.5 H2.17@3985.21,4819.5
PD5: H2.18 U1.7 | length 860.1
  Top Layer w4: v1(3620.5,4529.5) 3620.5,4523.5 3651.06,4492.94 U1.7@3651.06,4392.81
  Inner2 w4.5: v1(3620.5,4529.5) 3620.5,4523.5 3650.5,4493.5 3795.5,4493.5 3898.5,4596.5 3898.5,4854.5 3963.5,4919.5 H2.18@3985.21,4919.5
PD6: H1.2 U1.8 | length 869.1
  Top Layer w4: v1(3405.5,4570.5) 3406.5,4569.5 3437.5,4569.5 3449.5,4557.5 3567.5,4557.5 3637.28,4487.72 U1.8@3637.28,4392.81
  Inner2 w4: H1.2@3279.03,5019.5 3290.5,5019.5 3341.5,4968.5 3341.5,4908.5 3360.5,4889.5 3360.5,4615.5 v1(3405.5,4570.5)
PD7: H1.3 U1.9 | length 773.3
  Top Layer w4: v1(3425.5,4552.5) 3432.5,4545.5 3561.5,4545.5 3623.5,4483.5 U1.9@3623.5,4392.81
  Inner2 w4: H1.3@3279.03,4919.5 3296.5,4919.5 3343.5,4872.5 3343.5,4603.5 3394.5,4552.5 v1(3425.5,4552.5)
PD8: H1.4 U1.10 | length 644.5
  Top Layer w4: H1.4@3279.03,4819.5 3321.5,4777.03 3321.5,4695.5 3334.5,4682.5 3334.5,4617.5 3418.5,4533.5 3556.5,4533.5 3609.72,4480.28 U1.10@3609.72,4392.81
PD9: H1.5 U1.11 | length 538.2
  Top Layer w4: H1.5@3279.03,4719.5 3321.5,4677.03 3321.5,4614.5 3413.5,4522.5 3550.5,4522.5 3595.94,4477.06 U1.11@3595.94,4392.81
PD12: H1.6 U1.12 | length 457.7
  Top Layer w4.5: H1.6@3279.03,4619.5 3279.03,4588.97 3296,4572 3334,4572 3404,4502 3546.02,4502 3579.52,4468.5 3579.52,4414.18 3582.16,4411.54 U1.12@3582.16,4392.81
PD13: H1.7 U1.13 | length 440.4
  Top Layer w4.5: H1.7@3279.03,4519.5 3279.03,4547.03 3295.5,4563.5 3329.5,4563.5 3399.5,4493.5 3542.5,4493.5 3571.02,4464.98 3571.02,4414.18 3568.38,4411.54 U1.13@3568.38,4392.81
PD14: H1.8 U1.14 | length 443.3
  Top Layer w4.5: H1.8@3279.03,4419.5 3279.03,4398.97 3303,4375 3331.5,4375 3341,4384.5 3341,4444 3368,4471 3528.02,4471 3551.96,4447.06 3551.96,4414.18 3554.6,4411.54 U1.14@3554.6,4392.81
PD15: H1.9 U1.15 | length 430.2
  Top Layer w4.5: H1.9@3279.03,4319.5 3279.03,4344.03 3301.5,4366.5 3335.02,4366.5 3349.5,4380.98 3349.5,4436.5 3375.5,4462.5 3524.5,4462.5 3543.46,4443.54 3543.46,4414.18 3540.82,4411.54 U1.15@3540.82,4392.81
PD16: H1.10 U1.16 | length 643.3
  Top Layer w4.5: v1(3522.95,4433.05) 3524.4,4431.6 3524.4,4409.6 3527.04,4406.96 U1.16@3527.04,4392.81
  Inner2 w4.5: H1.10@3279.03,4219.5 3279.03,4193.97 3298.5,4174.5 3329.5,4174.5 3351.5,4196.5 3351.5,4460.5 3381.99,4490.99 3489.01,4490.99 3517.5,4462.5 3517.5,4438.5 v1(3522.95,4433.05)
PD17: H1.11 U1.17 | length 630
  Top Layer w4.5: v1(3500.48,4432.92) 3515.9,4417.5 3515.9,4408.9 3513.26,4406.26 U1.17@3513.26,4392.81
  Inner2 w4.5: H1.11@3279.03,4119.5 3279.03,4144.03 3301,4166 3333.02,4166 3360,4192.98 3360,4454 3388.49,4482.49 3482.51,4482.49 3505.62,4459.38 3505.62,4438.05 v1(3500.48,4432.92)
PD18: H1.12 U1.20 | length 555.1
  Top Layer w4.5: H1.12@3279.03,4019.5 3279.03,3997.97 3302,3975 3319.98,3975 3348,4003.02 3348,4280.02 3406.52,4338.54 3467.82,4338.54 3470.46,4341.18 U1.20@3489.19,4341.18
PD19: H1.13 U1.21 | length 557.9
  Top Layer w4.5: H1.13@3279.03,3919.5 3279.03,3944.03 3301.5,3966.5 3323.5,3966.5 3356.5,3999.5 3356.5,4276.5 3410.04,4330.04 3467.82,4330.04 3470.46,4327.4 U1.21@3489.19,4327.4
PD20: H1.14 U1.22 | length 727.2
  Top Layer w4.5: H1.14@3279.03,3819.5 3279.03,3794.97 3299.5,3774.5 3325.5,3774.5 3375.01,3824.01 3375.01,4269.01 3416.98,4310.98 3467.82,4310.98 3470.46,4313.62 U1.22@3489.19,4313.62
PD21: H1.15 U1.23 | length 728.9
  Top Layer w4.5: H1.15@3279.03,3719.5 3279.03,3746.03 3298.5,3765.5 3328.52,3765.5 3383.51,3820.49 3383.51,4265.49 3420.5,4302.48 3467.82,4302.48 3470.46,4299.84 U1.23@3489.19,4299.84
PD22: H2.12 U1.1 | length 381.9
  Top Layer w4: U1.1@3733.74,4392.81 3733.74,4410.74 3746.5,4423.5 3794.5,4423.5 3833.5,4462.5 3896.5,4462.5 3941.5,4417.5 3941.5,4370.5 3985.21,4326.79 H2.12@3985.21,4319.5
PE0: H1.16 U1.24 | length 789.1
  Top Layer w4.5: H1.16@3279.03,3619.5 3293.5,3619.5 3402.5,3728.5 3402.5,4225.5 3417.5,4240.5 3417.5,4260.5 3443.06,4286.06 U1.24@3489.19,4286.06
PE1: H1.17 U1.25 | length 865.6
  Top Layer w4.5: H1.17@3279.03,3519.5 3323.5,3563.97 3323.5,3631.5 3414.5,3722.5 3414.5,4220.5 3428.5,4234.5 3428.5,4255.5 3445.28,4272.28 U1.25@3489.19,4272.28
PE2: H1.18 U1.26 | length 956.3
  Top Layer w4: v1(3446.5,4250.5) 3447.5,4251.5 3461.5,4251.5 3468.5,4258.5 U1.26@3489.19,4258.5
  Inner2 w4: H1.18@3279.03,3419.5 3327.5,3467.97 3327.5,4122.5 3380.5,4175.5 3380.5,4201.5 3429.5,4250.5 v1(3446.5,4250.5)
PE3: H1.19 U1.27 | length 1040.9
  Top Layer w4: v1(3447.5,4226.5) 3460.5,4239.5 3466.84,4239.5 3472.06,4244.72 U1.27@3489.19,4244.72
  Inner2 w4: H1.19@3279.03,3319.5 3327.5,3367.97 3327.5,3447.5 3339.5,3459.5 3339.5,4116.5 3392.5,4169.5 3392.5,4195.5 3424.5,4227.5 3446.5,4227.5 v1(3447.5,4226.5)
PE4: H1.20 U1.28 | length 1183.8
  Top Layer w4: U1.28@3489.19,4230.94 3507.94,4230.94 v1(3516.5,4239.5)
  Inner2 w4: H1.20@3279.03,3219.5 3327.5,3267.97 3327.5,3344.5 3340.5,3357.5 3340.5,3438.5 3350.5,3448.5 3350.5,4108.5 3405.5,4163.5 3405.5,4187.5 3426.5,4208.5 3455.5,4208.5 3479.5,4232.5 3509.5,4232.5 v1(3516.5,4239.5)
PE5: H2.6 U1.29 | length 1232.9
  Top Layer w4: v1(3448.5,4190.5) 3475.16,4217.16 U1.29@3489.19,4217.16
  Inner2 w4.5: v1(3448.5,4190.5) 3480.5,4190.5 3504.5,4214.5 3538.5,4214.5 3566.5,4186.5 3566.5,4141.5 3603.5,4104.5 3603.5,4082.5 3618.5,4067.5 3618.5,3972.5 3644.5,3946.5 3644.5,3825.77 3596.5,3777.77 3596.5,3723.5 3723.5,3596.5 3920.5,3596.5 3938.5,3614.5 3938.5,3672.79 H2.6@3985.21,3719.5
PE6: H2.5 U1.30 | length 1066.6
  Top Layer w4: U1.30@3489.19,4203.38 3512.62,4203.38 v1(3519.5,4196.5)
  Inner2 w4.5: v1(3519.5,4196.5) 3528.5,4196.5 3552.5,4172.5 3552.5,4129.5 3587.5,4094.5 3587.5,4075.5 3601.5,4061.5 3601.5,3959.5 3626.5,3934.5 3626.5,3833.36 3576.5,3783.36 3576.5,3717.5 3716.5,3577.5 3931.5,3577.5 3973.5,3619.5 H2.5@3985.21,3619.5
PE7: H2.4 U1.31 | length 1157.7
  Top Layer w4: v1(3449.5,4165.5) 3453.5,4169.5 3454.5,4169.5 3475.5,4190.5 3488.29,4190.5 U1.31@3489.19,4189.6
  Inner2 w4.5: v1(3449.5,4165.5) 3490.5,4165.5 3501.5,4176.5 3526.5,4176.5 3537.5,4165.5 3537.5,4117.5 3571.5,4083.5 3571.5,4067.5 3581.5,4057.5 3581.5,3952.5 3607.5,3926.5 3607.5,3837 3558.5,3788 3558.5,3710.5 3708.5,3560.5 3895.5,3560.5 3936.5,3519.5 H2.4@3985.21,3519.5
PE8: H2.3 U1.32 | length 1130.1
  Top Layer w4: U1.32@3489.19,4175.82 3502.18,4175.82 v1(3519.5,4158.5)
  Inner2 w4.5: v1(3519.5,4158.5) 3519.5,4108.5 3556.5,4071.5 3556.5,4058.5 3564.5,4050.5 3564.5,3940.5 3590.5,3914.5 3590.5,3849.52 3540.5,3799.52 3540.5,3706.5 3702.5,3544.5 3887.5,3544.5 3933.5,3498.5 3933.5,3452.5 3966.5,3419.5 H2.3@3985.21,3419.5
PE9: H2.2 U1.33 | length 1286.2
  Top Layer w4: v1(3450.5,4138.5) 3474.04,4162.04 U1.33@3489.19,4162.04
  Inner2 w4.5: v1(3450.5,4138.5) 3454.5,4138.5 3497.5,4095.5 3511.5,4095.5 3541.5,4065.5 3541.5,4050.5 3549.5,4042.5 3549.5,3940.5 3537.5,3928.5 3537.5,3883.5 3505.5,3851.5 3505.5,3714.5 3595.5,3624.5 3595.5,3604.5 3609.5,3590.5 3631.5,3590.5 3691.5,3530.5 3877.5,3530.5 3917.5,3490.5 3917.5,3341.5 3941.5,3317.5 3983.21,3317.5 H2.2@3985.21,3319.5
PE10: H2.1 U1.34 | length 1344.3
  Top Layer w4: v1(3450.5,4111.5) 3452.43,4111.5 U1.34@3489.19,4148.26
  Inner2 w4.5: v1(3450.5,4111.5) 3459.5,4111.5 3489.5,4081.5 3505.5,4081.5 3525.5,4061.5 3525.5,4043.5 3535.1,4033.9 3535.1,3950.1 3487.5,3902.5 3487.5,3708.5 3578.5,3617.5 3578.5,3603.5 3606.5,3575.5 3625.5,3575.5 3688.5,3512.5 3874.5,3512.5 3903.5,3483.5 3903.5,3331.5 3943.5,3291.5 3943.5,3256.5 3980.5,3219.5 H2.1@3985.21,3219.5
SDC0_CLK: R2.2 U9.5 | length 487.3
  Top Layer w4.5: v1(3593.5,3550.5) 3593.84,3550.16 U9.5@3593.84,3512.74 ; v1(3682.5,3691.5) 3682.5,3825.38 3721.5,3864.38 3721.5,3921.49 R2.2@3729.5,3929.5
  Bottom Layer w4.5: v1(3593.5,3550.5) 3593.5,3626.5 3658.5,3691.5 v1(3682.5,3691.5)
SDC0_CMD: U1.48 U9.3 | length 708.4
  Top Layer w4.5: U9.3@3680.46,3512.74 3680.46,3534.96 3697.83,3552.33 3720.47,3552.33 3753.5,3585.36 3753.5,3640.5 3787.5,3674.5 3787.5,3909.5 3753.23,3943.77 3753.23,3979.77 3737.5,3995.5 3737.5,4004.5 3725.5,4016.5 3725.5,4037.5 3692.4,4070.6 U1.48@3692.4,4124.19
SDC0_D0: U1.46 U9.7 | length 753.4
  Top Layer w4.5: U9.7@3507.23,3512.74 3508.23,3513.74 3508.23,3526.23 3536.5,3554.5 3560.5,3554.5 3578.5,3572.5 3626.5,3572.5 3665.5,3611.5 3665.5,3832.99 3706.5,3873.99 3706.5,3988.5 3694.5,4000.5 3694.5,4019.5 3664.84,4049.16 U1.46@3664.84,4124.19
SDC0_D1: U1.45 U9.8 | length 780.2
  Top Layer w4.5: U9.8@3463.92,3512.74 3463.92,3529.92 3480.5,3546.5 3508.5,3546.5 3529.5,3567.5 3554.5,3567.5 3572.5,3585.5 3619.5,3585.5 3651.06,3617.06 3651.06,3845.12 3690.5,3884.56 3690.5,3984.5 3679.5,3995.5 3679.5,4011.5 3651.06,4039.94 U1.45@3651.06,4124.19
SDC0_D2: U1.50 U9.1 | length 674.4
  Top Layer w4.5: U1.50@3719.96,4124.19 3719.96,4088.04 3757.5,4050.5 3757.5,4037.5 3767.5,4027.5 3767.5,4013.5 3786.5,3994.5 3786.5,3954.5 3819.5,3921.5 3819.5,3660.5 3785.5,3626.5 3785.5,3569.5 3767.07,3551.07 U9.1@3767.07,3512.74
SDC0_D3: U1.49 U9.2 | length 684
  Top Layer w4.5: U1.49@3706.18,4124.19 3706.18,4080.82 3740.5,4046.5 3740.5,4024.5 3753.5,4011.5 3753.5,4003.5 3770.5,3986.5 3770.5,3949.5 3802.5,3917.5 3802.5,3668.5 3769.5,3635.5 3769.5,3578.5 3723.76,3532.76 U9.2@3723.76,3512.74
SDC0_DC: R11.2 U1.44 | length 757.9
  Top Layer w4.5: U1.44@3637.28,4124.19 3637.28,4152.28 v1(3637.5,4152.5) ; R11.2@3815.5,3608.5 v1(3815.5,3629.5)
  Inner2 w6: v1(3637.5,4152.5) 3658.5,4131.5 3658.5,4076.5 3640.5,4058.5 3640.5,3982.5 3664.5,3958.5 3664.5,3819.19 3615.5,3770.19 3615.5,3733.5 3675.5,3673.5 3729.5,3673.5 3773.5,3629.5 v1(3815.5,3629.5)
SPI0-CLK: R1.1 U8.6 | length 425.1
  Top Layer w4.5: U8.6@3515.5,3650.86 3515.5,3679.5 3504.5,3690.5 3504.5,3849.5 3520.5,3865.5 3647.82,3865.5 3664.5,3882.18 R1.1@3664.5,3930.5
SPI0-CS0: SW1.4 U1.41 U8.1 | length 700.8
  Top Layer w4.5: U1.41@3595.94,4124.19 3595.94,4096.94 3589.5,4090.5 3589.5,4082.5 3586.5,4079.5 3586.5,3997.5 3615.5,3968.5 U8.1@3615.5,3946.14
  Top Layer w5: v1(3554.13,3881.07) 3591.07,3881.07 3615.5,3905.5 U8.1@3615.5,3946.14
  Top Layer w8: SW1.4@3844.82,3887.09 3866.43,3865.48 v1(3871.72,3865.48)
  Inner1 w5: v1(3554.13,3881.07) 3597.93,3881.07 3655.5,3823.5 3829.74,3823.5 v1(3871.72,3865.48)